# Altium PCB Psyduck.PcbDoc
Units mm, origin at the board's own origin, x right, y up, seen from the top; angles counter-clockwise.
Board outline 38.1 x 25.4 mm, 2 copper layers (Top Layer, Bottom Layer); 15 components, 15 nets, 75 pads, 0 vias.
Unrouted connection lines stored in the file: 41.
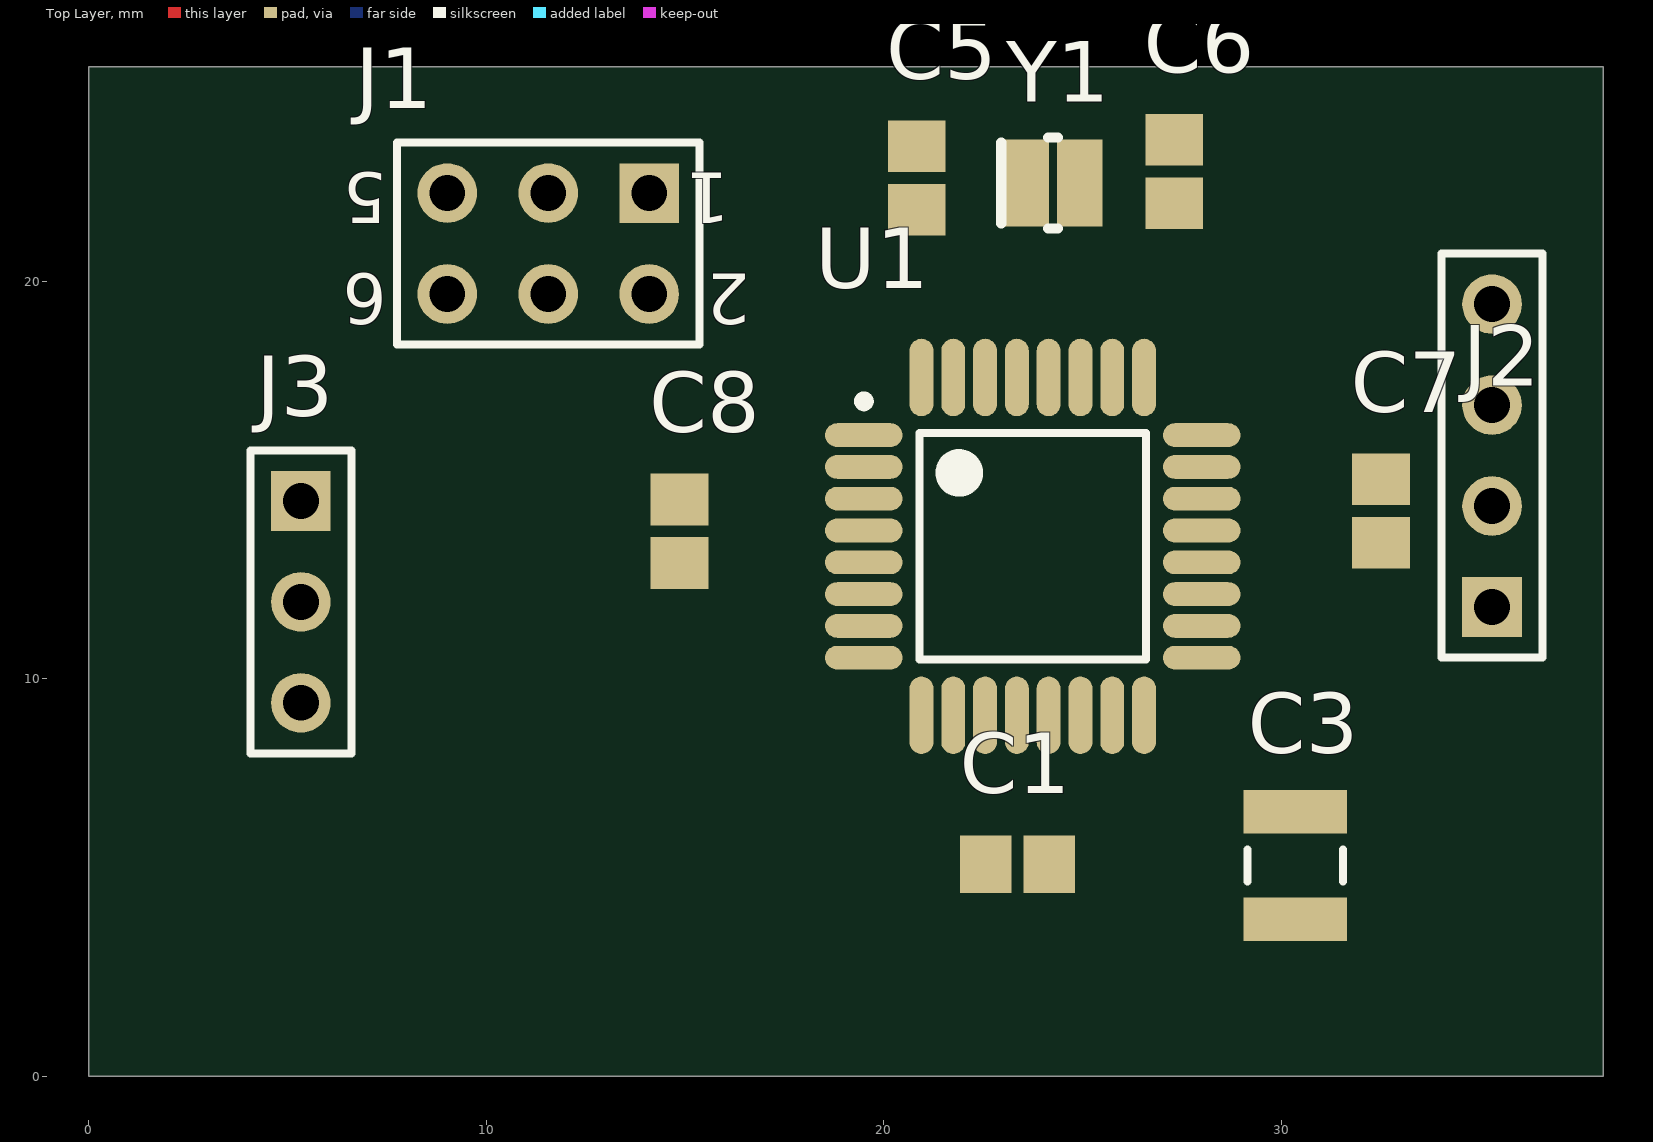
[diagram p0: Top Layer view]
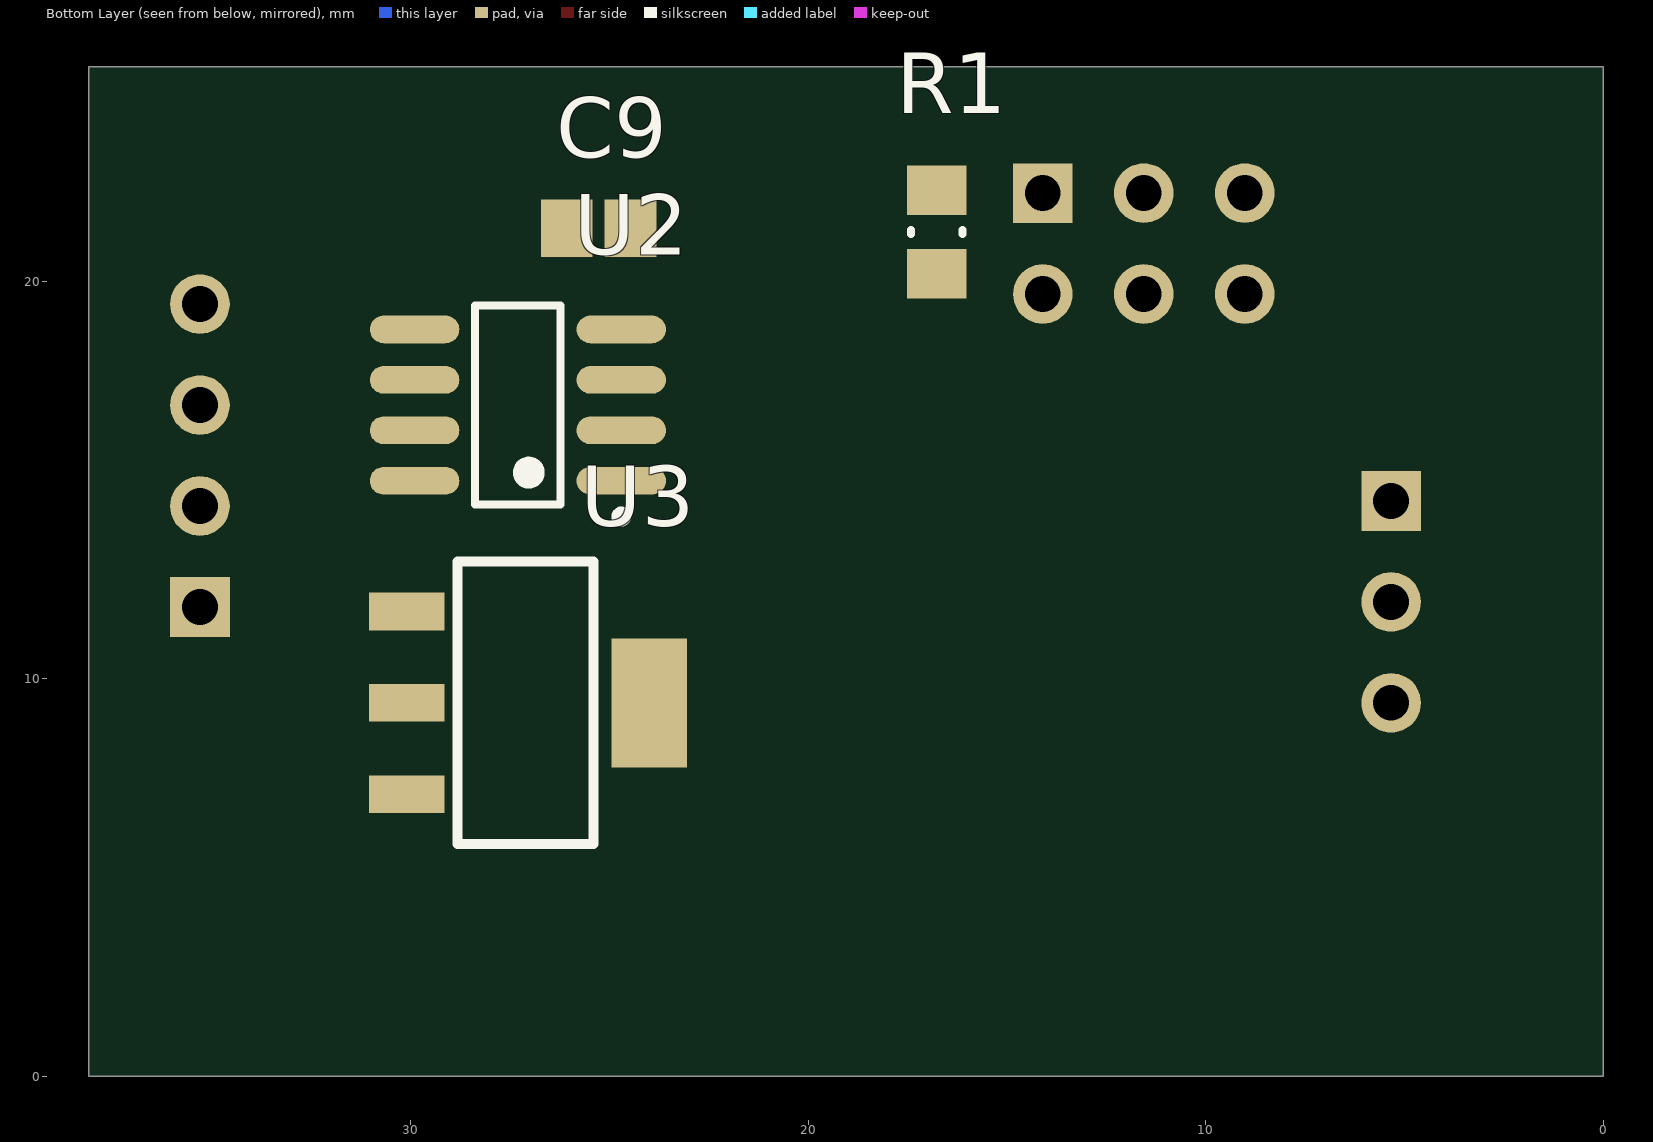
[diagram p1: Bottom Layer view, seen from below]

## Layer stack, top to bottom
Top Solder: solder mask 0.01, Solder Resist, Dk 3.5
Top Layer: signal copper 0.036
Dielectric 1: dielectric 0.32, FR-4, Dk 4.8
Bottom Layer: signal copper 0.036
Bottom Solder: solder mask 0.01, Solder Resist, Dk 3.5

## Board outline
0,0 0,25.4 38.1,25.4 38.1,0

## Design rules (kind name [scope] priority, off if disabled: settings)
Clearance [All] p1: gap=0.254 ignorepadtopadclearanceinfootprint=FALSE except(0: Arc-Hole Track-Hole SMDPad-Hole THPad-Hole Via-Hole Fill-Hole Poly-Hole Region-Hole Text-Hole)
PolygonConnect [All] p1: connectstyle=Relief reliefconductorwidth=0.254 reliefentries=4 polygonreliefangle="90 Angle" airgapwidth=0.254
RoomDefinition Psyduck [InComponentClass('Psyduck')] p1: confinementstyle=ConfineIn formatcopy=TRUE lockcomponents=FALSE outline 0,0 38.227,0 38.227,25.654 0,25.654
RoutingVias [All] p1: holewidth=0.711 width=1.27 viastyle="Through Hole" minholewidth=0.711 minwidth=1.27 maxholewidth=0.711 maxwidth=1.27
SolderMaskExpansion [All] p1: expansion=0.102 istentingtop=FALSE
Width [All] p1: maxlimit=0.254 minlimit=0.254 preferedwidth=0.254
30 further rules are at their usual default settings.

## Components (designator, comment, footprint, x,y, rotation, side; value= is the part's Value field where it differs from the comment)
C1 "100nF" CAPC2013X88X50NL20T25 23.368,5.334 r0 top
C3 "" C1210 30.353,5.306 r270 top value=100uF
C5 "10p" CAPC2013X88X50NL20T25 20.828,22.606 r270 top
C6 "10p" CAPC2013X88X50NL20T25 27.305,22.771 r270 top
C7 "100n" CAPC2013X88X50NL20T25 32.512,14.224 r90 top
C8 "100p" CAPC2013X88X50NL20T25 14.859,13.716 r90 top
C9 "100n" CAPC2013X88X50NL20T25 25.273,21.336 r180 bottom
J1 "ISP-6" HDR2X3 14.097,22.225 r180 top
J2 "B4B-EH-A" HDR1X4 35.306,11.811 r90 top
J3 "B3B-EH-A" HDR1X3 5.334,14.478 r270 top
R1 "10k" RESC0805(2012)_M 16.764,21.243 r90 bottom value="10000.00 Ohm"
U1 "ATmega32M1-AU" 32A_M 23.749,13.335 r0 top
U2 "TJA1050T/CM,118" NXP-SOT96-1_M 27.305,16.891 r0 bottom
U3 "Volt Reg" MCP1799 27.051,9.398 r270 bottom
Y1 "Crystal" XRCHA16M000F0A01R0 24.257,22.479 r0 top

## Footprints (in the part's own frame and the unit in brackets; to place one, negate y for a bottom-side part, rotate by r counter-clockwise, add the part's x,y. Pads: shape width x height; smd on the part's side, far side on the other; paste and mask are expansions set on the pad)
32A_M [mm] "Thin QFP, 32-Leads, Body 7x7mm, Pitch 0.8mm, IPC Low Density"
  oval 1.95x0.6 smd: 1(-4.25,2.8) 2(-4.25,2) 3(-4.25,1.2) 4(-4.25,0.4) 5(-4.25,-0.4) 6(-4.25,-1.2) 7(-4.25,-2) 8(-4.25,-2.8) 17(4.25,-2.8) 18(4.25,-2) 19(4.25,-1.2) 20(4.25,-0.4) 21(4.25,0.4) 22(4.25,1.2) 23(4.25,2) 24(4.25,2.8)
  oval 0.6x1.95 smd: 9(-2.8,-4.25) 10(-2,-4.25) 11(-1.2,-4.25) 12(-0.4,-4.25) 13(0.4,-4.25) 14(1.2,-4.25) 15(2,-4.25) 16(2.8,-4.25) 25(2.8,4.25) 26(2,4.25) 27(1.2,4.25) 28(0.4,4.25) 29(-0.4,4.25) 30(-1.2,4.25) 31(-2,4.25) 32(-2.8,4.25)
  silkscreen extent -4.37,-2.85 2.85,3.77, body extent -3.5,-3.5 3.5,3.5, height 1.2
C1210 [mm] "Chip Capacitor, Body 3.2x2.5mm, IPC High Density"
  rect 1.1x2.6 smd: 1(-1.35,0) 2(1.35,0)
  silkscreen extent -0.4,-1.2 0.4,1.2, body extent -1.7,-1.35 1.7,1.35, height 1.3
CAPC2013X88X50NL20T25 [mm] "Chip Capacitor, 2-Leads, Body 2.00x1.25mm, IPC Medium Density"
  rect 1.3x1.45 smd: 1(-0.8,0) 2(0.8,0)
  body extent -1.1,-0.72 1.1,0.72, height 0.88
HDR1X3 [mm] "Connector; Header; 3 Position"
  rect 1.5x1.5 hole 0.9: 1(0,0)
  round 1.5 hole 0.9: 2(2.54,0) 3(5.08,0)
  silkscreen extent -1.27,-1.27 6.35,1.27
HDR1X4 [mm] "Connector; Header; 4 Position"
  rect 1.5x1.5 hole 0.9: 1(0,0)
  round 1.5 hole 0.9: 2(2.54,0) 3(5.08,0) 4(7.62,0)
  silkscreen extent -1.27,-1.27 8.89,1.27
HDR2X3 [mm] "Connector; Header; 3x2 Position"
  rect 1.5x1.5 hole 0.9: 1(0,0)
  round 1.5 hole 0.9: 2(0,2.54) 3(2.54,0) 4(2.54,2.54) 5(5.08,0) 6(5.08,2.54)
  silkscreen extent -1.27,-1.27 6.35,3.81
MCP1799 [mm] "Voltage Regulators"
  rect 0.95x1.9 smd: 1(-2.3,-3.05) 2(0,-3.05) 3(2.3,-3.05)
  rect 3.25x1.9 smd: 3(0,3.05)
  silkscreen extent -3.56,-1.78 3.56,1.65
NXP-SOT96-1_M [mm] "SOIC, 8-Leads, Body 5x4mm, Pitch 1.27mm, IPC Low Density"
  oval 2.25x0.7 smd: 1(-2.6,1.905) 2(-2.6,0.635) 3(-2.6,-0.635) 4(-2.6,-1.905) 5(2.6,-1.905) 6(2.6,-0.635) 7(2.6,0.635) 8(2.6,1.905)
  silkscreen extent -2.72,-2.5 1.07,2.93, body extent -2,-2.5 2,2.5, height 1.75
RESC0805(2012)_M [mm] "Chip Resistor, Body 2.0x1.3mm, IPC Low Density"
  rect 1.25x1.5 smd: 1(-1.05,0) 2(1.05,0)
  silkscreen extent -0.05,-0.65 0.05,0.65, body extent -1.1,-0.67 1.1,0.67, height 0.7
XRCHA16M000F0A01R0 [mm]
  rect 1.15x2.2 smd: 1(-0.675,0) 2(0.675,0)
  silkscreen extent -1.3,-1.14 0.13,1.14

## Part data
C1 C5 C6 C7 C8 C9: library part CMP-2007-00279-1, Manufacturer=Samsung, Part Number=CL21B104JBCNNNC
C3: library part "Cap Semi", "Capacitor (Semiconductor SIM Model)", LatestRevisionDate=29-May-2009, LatestRevisionNote="IPC-7351 Footprint Added.", PackageDescription="Chip Capacitor", PackageReference=C1206, Published=8-Jun-2000, Publisher="Altium Limited"
J1: library part "Header 3X2", "Header, 3-Pin, Dual row", LatestRevisionDate=17-Jul-2002, LatestRevisionNote="Re-released for DXP Platform.", Publisher="Altium Limited"
J2: library part MHDR1X4, "Header, 4-Pin", LatestRevisionDate=17-Jul-2002, LatestRevisionNote="Re-released for DXP Platform.", Publisher="Altium Limited"
J3: library part MHDR1X3, "Header, 3-Pin", LatestRevisionDate=17-Jul-2002, LatestRevisionNote="Re-released for DXP Platform.", Publisher="Altium Limited"
R1: library part CMP-1013-00528-1, Case-EIA=0805, Case-Metric=2012, Technology=SMT
U1: library part CMP-0096-00150-2, "8-bit AVR Microcontroller, 2.7-5.5V, 16MHz, 32KB Flash, 1KB EEPROM, 2KB SRAM, Industrial Grade (-40° to +85°C), 32-Pin TQFP", Code_JEDEC=MS-026-ABA, ComponentLink1Description="Manufacturer URL", ComponentLink1URL=http://www.atmel.com/, ComponentLink2Description="ATmega16M1/32M1/64M1 Datasheet", ComponentLink2URL=http://www.atmel.com/dyn/resources/prod_documents/doc8209.pdf, ComponentLink3Description="ATmega16M1/32M1/64M1 Summary", ComponentLink3URL=http://www.atmel.com/dyn/resources/prod_documents/8209S.pdf, DatasheetVersion="revD, Nov-2010", PackageDescription="32-Lead, 7x7x1.0 mm Body, 0.8mm Lead Pitch, Thin Profile Plastic Quad Flat Package (TQFP)", PackageReference=32A, PackageVersion="revC, Oct-2010", RevisionNote="DatasheetVersion & PackageVersion updated. URLs added."
U2: library part CMP-2000-04923-1, "High speed CAN transceiver, 4.75 to 5.25 V, -40 to 150 degC, 8-Pin SO (SOT96-1), RoHS, Tape and Reel", Manufacturer="NXP Semiconductors", Package / Case="8-SOIC(0.154\",3.90mmWidth)", Package Description="8-Pin Small Outline Integrated Circuit, Body 4.9 x 3.9 mm, Pitch 1.27 mm", Package Reference=SOT96-1, Standard Package=1, Supplier Device Package=8-SO, Voltage - Supply=4.75V~5.25V, <PCN>=http://media.digikey.com/pdf/PCNs/NXP/201209019F04_TJA1050_Obs.pdf, Category=IntegratedCircuits(ICs), Datasheet URL=http://www.nxp.com/documents/data_sheet/TJA1050.pdf, Datasheet Version="Rev. 4, 10/2003", Duplex=Half, Dynamic Catalog=CANTransceivers, Family=Interface-Drivers,Receivers,Transceivers, Manufacturer URL=http://www.nxp.com/, Minimum Quantity=Transceiver, Mounting Type=SurfaceMount, Number of Drivers/Receivers=1/1, Other Names=568-10292-1, Package/Case="8-SOIC(0.154\",3.90mmWidth)", Packaging=CutTape(CT), PCN Obsolescence="TJA105028/Apr/2013 /  / MultipleDevices19/Apr/2013", PCN Packaging=LighterPackingReels30/Mar/2014, Product Training Modules=CANandLINBusTransceiver, Protocol=CAN, Quantity Available=CutTape(CT)AlternatePackaging, Receiver Hysteresis=70mV, Type=Transceiver
U3: "Voltage Regulator", LatestRevisionDate=29-May-2009, LatestRevisionNote="IPC-7351 Footprint Added.", PackageDescription="3-Pin Transistor Outline Package 2.54 mm Pitch, 15.1 mm Lead Span", PackageReference=D2PAK, Published=24-Mar-1999, Publisher="Altium Limited"
Y1: library part XTAL, "Crystal Oscillator", LatestRevisionDate=17-Jul-2002, LatestRevisionNote="Re-released for DXP Platform.", PackageDescription="Crystal, Thru-Hole; 2 Leads; Body 3.1 x 8.2 mm (Dia.xH)", PackageReference=R38, Published=8-Jun-2000, Publisher="Altium Limited"

## Nets (pads, with @x,y where several pads share a name; then routed paths per layer and width w, separated by ;. In a path a pad name is that pad's centre, name@x,y a point inside that pad or via, vN(x,y) a via of type N, cw(c..) or ccw(c..) an arc to the next point about the centre after c; other vN are vias at no path point)
5V: C1.2 C3.2 C7.1 C8.2 C9.2 J3.1 R1.1 U1.4 U1.19 U1.21 U2.3 U3.3
GND: C1.1 C3.1 C7.2 C8.1 C9.1 J1.6 J2.2 J3.2 U1.5 U1.20 U2.2 U2.8 U3.2
NetC5_1: C5.1 C6.1
NetC5_2: C5.2 U1.11 Y1.1
NetC6_2: C6.2 U1.10 Y1.2
NetJ1_1: J1.1 U1.1
NetJ1_2: J1.2 J2.1 U3.1
NetJ1_3: J1.3 U1.12
NetJ1_4: J1.4 U1.2
NetJ1_5: J1.5 R1.2 U1.31
NetJ2_3: J2.3 U2.7
NetJ2_4: J2.4 U2.6
NetJ3_3: J3.3 U1.13
NetU1_6: U1.6 U2.1
NetU1_7: U1.7 U2.4
pads on no net: U1.3 U1.8 U1.9 U1.14 U1.15 U1.16 U1.17 U1.18 U1.22 U1.23 U1.24 U1.25 U1.26 U1.27 U1.28 U1.29 U1.30 U1.32 U2.5

## Text inside footprints (layer, text, board x,y; h text height)
J1: Top Overlay "6" at 7.493,20.193 h1.27 r180; Top Overlay "5" at 7.493,22.733 h1.27 r180; Top Overlay "2" at 16.637,20.193 h1.27 r180; Top Overlay "1" at 16.129,22.733 h1.27 r180